# Altium PCB RPI_FEZ_DAC_00.PcbDoc
Units mm, origin at the board's own origin, x right, y up, seen from the top; angles counter-clockwise.
Board outline 65 x 30.5 mm, 2 copper layers (Top Layer, Bottom Layer), stack 1.571 mm thick; 37 components, 44 nets, 196 pads, 22 vias.
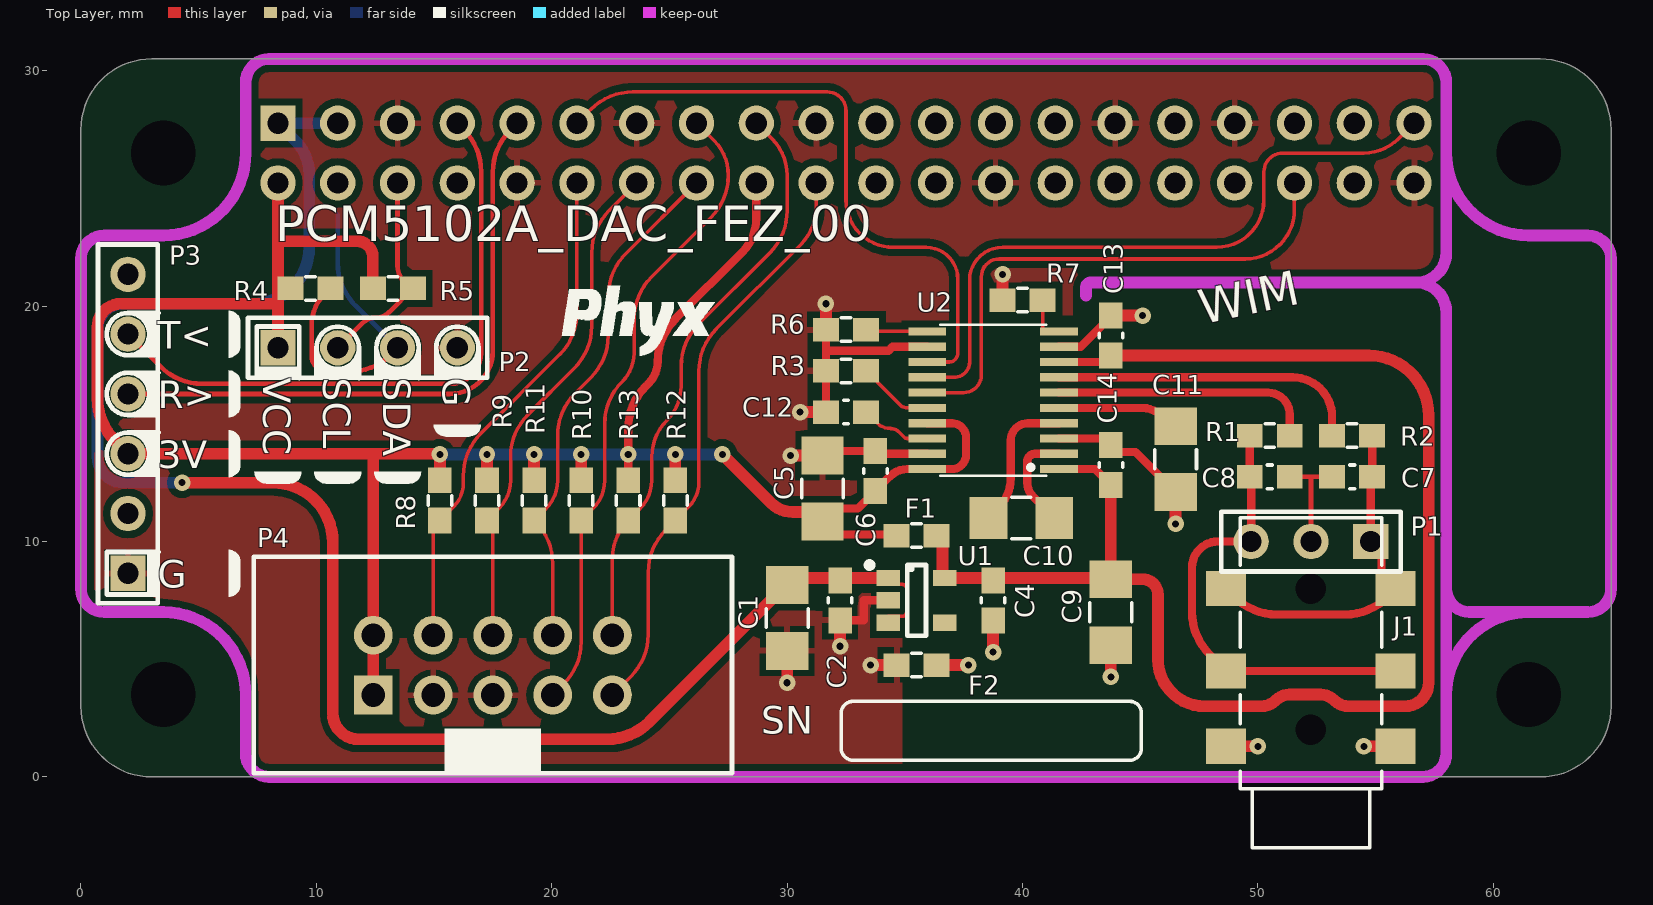
[diagram p0: Top Layer view]
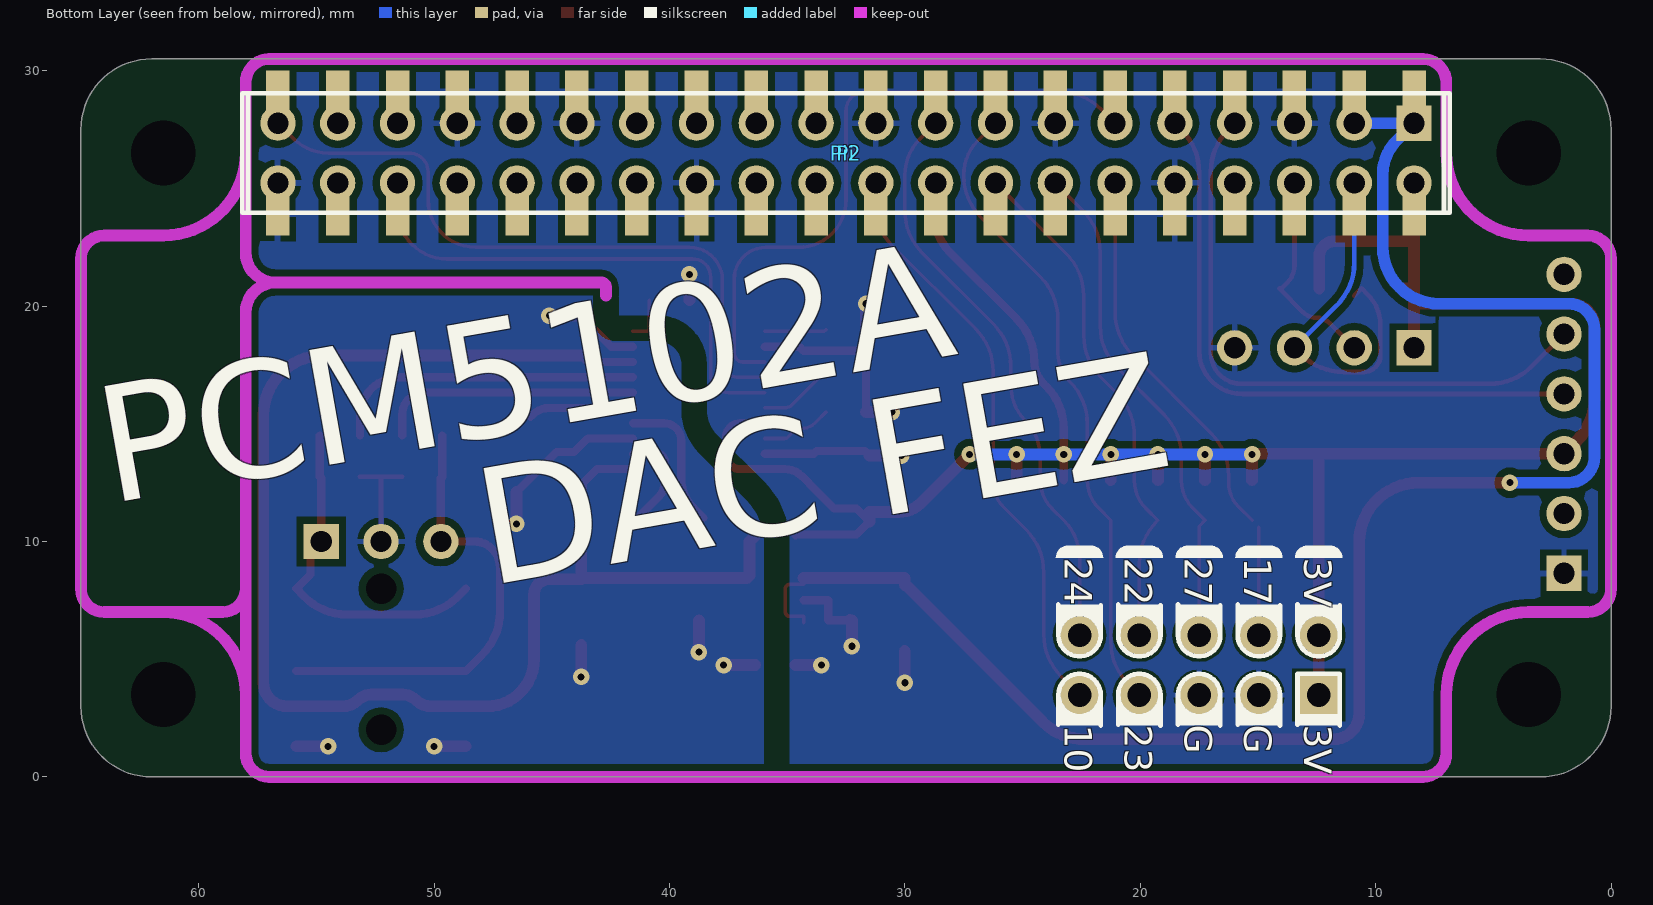
[diagram p1: Bottom Layer view, seen from below]

## Layer stack, top to bottom
Top Solder: solder mask 0.0102, Solder Resist, Dk 3.5
Top Layer: signal copper 0.0356
Dielectric1: core 1.5, FR-4, Dk 4.8
Bottom Layer: signal copper 0.0356
Bottom Solder: solder mask 0.0102, Solder Resist, Dk 3.5

## Board outline
0,3 0,27.5 cw(c3,27.5) 3,30.5 62,30.5 cw(c62,27.5) 65,27.5 65,3 cw(c62,3) 62,0 3,0 cw(c3,3)

## Design rules (kind name [scope] priority, off if disabled: settings)
Clearance Clearance_GND_POLY [InNamedPolygon('B_GND')] p1: gap=0.4 ignorepadtopadclearanceinfootprint=FALSE except(0: Arc-Hole Track-Hole SMDPad-Hole THPad-Hole Via-Hole Fill-Hole Poly-Hole Region-Hole Text-Hole)
Clearance [All] p2: gap=0.15 ignorepadtopadclearanceinfootprint=FALSE except(0: Arc-Hole Track-Hole SMDPad-Hole THPad-Hole Via-Hole Fill-Hole Poly-Hole Region-Hole Text-Hole; 0.3: Arc-Poly Track-Poly SMDPad-Poly THPad-Poly Via-Poly Fill-Poly; 1.1: Poly-Poly)
HoleSize [All] p1: absolutevalues=TRUE maxlimit=10 minlimit=0.025 maxpercent=80.000 minpercent=20.000
PolygonConnect PolygonConnect_VIA [IsVia] p1: connectstyle=Direct reliefconductorwidth=0.254 reliefentries=4 polygonreliefangle="90 Angle" airgapwidth=0.254
PolygonConnect [All] p2: connectstyle=Relief reliefconductorwidth=0.254 reliefentries=4 polygonreliefangle="90 Angle" airgapwidth=0.254
RoutingVias [All] p1: holewidth=0.3 width=0.7 viastyle="Through Hole" minholewidth=0.3 minwidth=0.2 maxholewidth=0.6 maxwidth=1.2
SilkToSolderMaskClearance SilkscreenOverComponentPads [IsPad] p1: minsilkscreentomaskgap=0.254 clearancetoexposedcopper=TRUE
SolderMaskExpansion [All] p1: expansion=0.05 istentingtop=FALSE
Width [All] p1: maxlimit=2 minlimit=0.15 preferedwidth=0.25
28 further rules are at their usual default settings.

## Classes and differential pairs
net class POWER: 3V3_Pi 3V3A 5V_Pi AGND GND

## Components (designator, comment, footprint, x,y, rotation, side; value= is the part's Value field where it differs from the comment)
C1 "CAP_CERAMIC" C1206_N 30,6.75 r270 top value="2u2F 25V"
C2 "CAP_CERAMIC" C0603_N 32.25,7.5 r270 top value="100nF 16V"
C4 "CAP_CERAMIC" C0603_N 38.75,7.5 r270 top value="100nF 16V"
C5 "CAP_CERAMIC" C1206_N 31.5,12.25 r90 top value="2u2F 25V"
C6 "CAP_CERAMIC" C0603_N 33.75,13 r90 top value="100nF 16V"
C7 "CAP_CERAMIC" C0603_N 54,12.75 r180 top value="2n2F 25V"
C8 "CAP_CERAMIC" C0603_N 50.5,12.75 r0 top value="2n2F 25V"
C9 "CAP_CERAMIC" C1206_N 43.75,7 r90 top value="2u2F 25V"
C10 "CAP_CERAMIC" C1206_N 39.95,11 r180 top value="2u2F 25V"
C11 "CAP_CERAMIC" C1206_N 46.5,13.5 r90 top value="2u2F 25V"
C12 "CAP_CERAMIC" C0603_N 32.5,15.5 r180 top value="100nF 16V"
C13 "CAP_CERAMIC" C0603_N 43.75,18.75 r90 top value="100nF 16V"
C14 "CAP_CERAMIC" C0603_N 43.75,13.25 r90 top value="100nF 16V"
F1 "BLM18KG601SN1D" L0603 35.5,10.25 r0 top value="1A3 0R15"
F2 "BLM18KG601SN1D" L0603 35.5,4.75 r0 top value="1A3 0R15"
J1 "3,5mm Stereo Audio Jack SMD" PJ-313D 52.25,8 r90 top value=PJ-313D
P1 "Header 3" HDR1X3 54.79,10 r180 top
P2 "Header 4" HDR1X4 8.37,18.23 r0 top
P3 "Header 6" HDR1X6 2,8.65 r90 top
P4 "Boxed Header 5X2" B_HDR2X5 17.5,4.75 r0 top
Pi "Receptacle # 2x20 61004021821" WE_61004021821 32.5,26.5 r0 bottom locked value=61004021821
Pi2 "Receptacle 20X2" HDR2X20 32.5,26.5 r0 bottom locked
R1 "RESISTOR" R0603_N 50.5,14.5 r0 top value=470R
R2 "RESISTOR" R0603_N 54,14.5 r180 top value=470R
R3 "RESISTOR" R0603_N 32.5,17.25 r180 top value=47K
R4 "RESISTOR" R0603_N 9.75,20.75 r0 top value=1K
R5 "RESISTOR" R0603_N 13.25,20.75 r0 top value=1K
R6 "RESISTOR" R0603_N 32.5,19 r180 top value=47K
R7 "RESISTOR" R0603_N 40,20.25 r180 top value=47K
R8 "RESISTOR" R0603_N 15.25,11.75 r270 top value=47K
R9 "RESISTOR" R0603_N 17.25,11.75 r270 top value=47K
R10 "RESISTOR" R0603_N 21.25,11.75 r90 top value=47K
R11 "RESISTOR" R0603_N 19.25,11.75 r270 top value=47K
R12 "RESISTOR" R0603_N 25.25,11.75 r90 top value=47K
R13 "RESISTOR" R0603_N 23.25,11.75 r270 top value=47K
U1 "3V3 150mA LDO" ONS_TSOP5 35.5,7.5 r0 top value=NCP511SN33T1G
U2 "Audio Stereo DAC 32BIT 112dB" TI_PW_R-PDSO-G20 38.75,16 r90 top value=PCM5102APWR

## Footprints (in the part's own frame and the unit in brackets; to place one, negate y for a bottom-side part, rotate by r counter-clockwise, add the part's x,y. Pads: shape width x height; smd on the part's side, far side on the other; paste and mask are expansions set on the pad)
B_HDR2X5 [mm] "Boxed Header 2x5 pins"
  rect 1.65x1.65 hole 1: 1(-5.08,-1.27)
  round 1.65 hole 1: 2(-5.08,1.27) 3(-2.54,-1.27) 4(-2.54,1.27) 5(0,-1.27) 6(0,1.27) 7(2.54,-1.27) 8(2.54,1.27) 9(5.08,-1.27) 10(5.08,1.27)
  silkscreen extent -10.16,-4.6 10.16,4.6, body extent -10.18,-4.42 10.18,4.75, height 8.93
C0603_N [mm] "Low density"
  rect 1.1x1 smd: 1(-0.85,0) 2(0.85,0)
  silkscreen extent -0.1,-0.5 0.1,0.5, body extent -0.8,-0.4 0.8,0.4, height 0.3
C1206_N [mm] "low density"
  rect 1.6x1.8 smd: 1(-1.4,0) 2(1.4,0)
  silkscreen extent -0.4,-0.89 0.4,0.89, body extent -1.6,-0.8 1.6,0.8, height 1
HDR1X3 [mm] "Connector; Header; 3 Position"
  rect 1.5x1.5 hole 0.9: 1(0,0)
  round 1.5 hole 0.9: 2(2.54,0) 3(5.08,0)
  silkscreen extent -1.27,-1.27 6.35,1.27, body extent -1.27,-1.23 6.35,1.27, height 8.2
HDR1X4 [mm] "Connector; Header; 4 Position"
  rect 1.5x1.5 hole 0.9: 1(0,0)
  round 1.5 hole 0.9: 2(2.54,0) 3(5.08,0) 4(7.62,0)
  silkscreen extent -1.27,-1.27 8.89,1.27, body extent -1.27,-1.23 8.89,1.27, height 8.2
HDR1X6 [mm] "Connector; Header; 6 Position"
  rect 1.5x1.5 hole 0.9: 1(0,0)
  round 1.5 hole 0.9: 2(2.54,0) 3(5.08,0) 4(7.62,0) 5(10.16,0) 6(12.7,0)
  silkscreen extent -1.27,-1.27 13.97,1.27, body extent -1.27,-1.23 13.97,1.27, height 8.2
HDR2X20 [mm] "Connector; Header; 20x2 Position"
  rect 1.5x1.5 hole 0.9: 1(-24.13,-1.27)
  round 1.5 hole 0.9: 2(-24.13,1.27) 3(-21.59,-1.27) 4(-21.59,1.27) 5(-19.05,-1.27) 6(-19.05,1.27) 7(-16.51,-1.27) 8(-16.51,1.27) 9(-13.97,-1.27) 10(-13.97,1.27) 11(-11.43,-1.27) 12(-11.43,1.27) 13(-8.89,-1.27) 14(-8.89,1.27) 15(-6.35,-1.27) 16(-6.35,1.27) 17(-3.81,-1.27) 18(-3.81,1.27) 19(-1.27,-1.27) 20(-1.27,1.27) 21(1.27,-1.27) 22(1.27,1.27) 23(3.81,-1.27) 24(3.81,1.27) 25(6.35,-1.27) 26(6.35,1.27) 27(8.89,-1.27) 28(8.89,1.27) 29(11.43,-1.27) 30(11.43,1.27) 31(13.97,-1.27) 32(13.97,1.27) 33(16.51,-1.27) 34(16.51,1.27) 35(19.05,-1.27) 36(19.05,1.27) 37(21.59,-1.27) 38(21.59,1.27) 39(24.13,-1.27) 40(24.13,1.27)
  silkscreen extent -25.4,-2.54 25.4,2.54, body extent -25.4,-2.54 25.4,2.54, height 8.5
L0603 [mm] "Low density 0603"
  rect 1.1x1 smd: 1(-0.85,0) 2(0.85,0)
  silkscreen extent -0.2,-0.5 0.2,0.5, body extent -0.8,-0.41 0.8,0.41, height 0.45
ONS_TSOP5 [mm] "SOT23, 5-Leads, Body 3,00x1,50mm, Pitch 0,95mm, IPC Medium Density"
  rect 1x0.7 smd: 1(-1.2,0.95) 2(-1.2,0) 3(-1.2,-0.95) 4(1.2,-0.95) 5(1.2,0.95)
  silkscreen extent -2.12,-1.5 0.4,1.62, body extent -1.5,-1.52 1.5,1.53, height 1.3
PJ-313D [mm] "PJ-313D Stereo Audio Jack SMD 3.5mm"
  round 1.2 hole 1.3 unplated: 0(-6,0) 0(0,0)
  rect 1.5x1.7 smd: 1(-6.7,-3.6) 1(-6.7,3.6) 2(-3.5,-3.6) 2(-3.5,3.6) 3(0,3.6) 3(0,-3.6)
  silkscreen extent -11,-3 3,3, body extent -11.04,-3 3,3, height 5
R0603_N [mm] "Low density"
  rect 1.1x1 smd: 1(-0.85,0) 2(0.85,0)
  silkscreen extent -0.2,-0.5 0.2,0.5, body extent -0.8,-0.41 0.8,0.41, height 0.45
TI_PW_R-PDSO-G20 [mm] "TI_PW_R-PDSO-G20"
  rect 0.35x1.6 smd mask+0.075: 1(-2.925,-2.8) 2(-2.275,-2.8) 3(-1.625,-2.8) 4(-0.975,-2.8) 5(-0.325,-2.8) 6(0.325,-2.8) 7(0.975,-2.8) 8(1.625,-2.8) 9(2.275,-2.8) 10(2.925,-2.8) 11(2.925,2.8) 12(2.275,2.8) 13(1.625,2.8) 14(0.975,2.8) 15(0.325,2.8) 16(-0.325,2.8) 17(-0.975,2.8) 18(-1.625,2.8) 19(-2.275,2.8) 20(-2.925,2.8)
  silkscreen extent -3.2,-2.25 3.2,2.25, body extent -3.3,-3.28 3.3,3.28, height 1.2
WE_61004021821 [mm] "Connector; Receptable; 20x2 Position SMD"
  rect 1x1.8 smd: 1(-24.13,-2.6) 2(-24.13,2.6) 3(-21.59,-2.6) 4(-21.59,2.6) 5(-19.05,-2.6) 6(-19.05,2.6) 7(-16.51,-2.6) 8(-16.51,2.6) 9(-13.97,-2.6) 10(-13.97,2.6) 11(-11.43,-2.6) 12(-11.43,2.6) 13(-8.89,-2.6) 14(-8.89,2.6) 15(-6.35,-2.6) 16(-6.35,2.6) 17(-3.81,-2.6) 18(-3.81,2.6) 19(-1.27,-2.6) 20(-1.27,2.6) 21(1.27,-2.6) 22(1.27,2.6) 23(3.81,-2.6) 24(3.81,2.6) 25(6.35,-2.6) 26(6.35,2.6) 27(8.89,-2.6) 28(8.89,2.6) 29(11.43,-2.6) 30(11.43,2.6) 31(13.97,-2.6) 32(13.97,2.6) 33(16.51,-2.6) 34(16.51,2.6) 35(19.05,-2.6) 36(19.05,2.6) 37(21.59,-2.6) 38(21.59,2.6) 39(24.13,-2.6) 40(24.13,2.6)
  silkscreen extent -25.65,-2.54 25.65,2.54, body extent -25.65,-3.35 25.65,3.35, height 7.42

## Part data
C1 C5 C9 C10 C11: library part "CAP # 2u2F 25V 1206", "Capacitor Ceramic", Supplier Part Number 1=1735544, Supplier 1=Farnell
C2 C4 C6 C12 C13 C14: library part "CAP # 100nF 16V 0603", "Capacitor Ceramic"
C7 C8: library part "CAP # 2n2F 25V 0603", "Capacitor Ceramic"
F1 F2: library part "FER # 600R 1A3 0603 0R15 BLM18KG601SN1D", Supplier Part Number 1=1781094, Supplier 1=Farnell
J1: library part "AUDIO JACK # 3.5 3c PJ-313D", "=Description", Supplier Part Number 1=PJ-313D, Supplier 1=AliExpress
P1: library part "Pin Header 2.54mm 3way"
P2: library part "Pin Header 2.54mm 4way"
P3: library part "Pin Header 2.54mm 6way"
P4: library part "Pin Header 2.54mm dual row 10way Boxed"
Pi: "=Description", Supplier 1=Farnell
Pi2: library part "Pin Header 2.54mm dual row 40way", "=Description"
R1 R2: library part "RES # 470R 0603"
R3 R6 R7 R8 R9 R10 R11 R12 R13: library part "RES # 47K 0603"
R4 R5: library part "RES # 1K 0603"
U1: library part "LDO # 3V3 0A15 NCP511SN33T1G", "=Description", Supplier Part Number 1=1652367, Supplier 1=Farnell
U2: library part "DAC # AUDIO PCM5102APWR", "=Description", Supplier Part Number 1=2402251, Supplier 1=Farnell

## Free pads (board coordinates)
  round 1.3 hole 2.75 unplated mask+2.45: 0(3.5,3.5) 0(3.5,26.5) 0(61.5,3.5) 0(61.5,26.5)

## Via types
v1: diameter 0.7, hole 0.3, Top Layer to Bottom Layer, 22 vias

## Nets (pads, with @x,y where several pads share a name; then routed paths per layer and width w, separated by ;. In a path a pad name is that pad's centre, name@x,y a point inside that pad or via, vN(x,y) a via of type N, cw(c..) or ccw(c..) an arc to the next point about the centre after c; other vN are vias at no path point)
3V3_PI: C5.1 C6.1 F1.1 P2.1 P3.3 P4.1 P4.2 Pi2.2 Pi2.18 Pi.2 Pi.18 R4.1 R5.1 R8.1 R9.1 R10.2 R11.1 R12.2 R13.1 U2.17 U2.20 | length 101.9
  Top Layer w0.35: R13.1 v1(23.25,13.7) 23.25,14.798 cw(c25.79,14.798) 23.994,16.594 24.113,16.713 ccw(c23.177,17.648) 24.5,17.648 cw(c27.04,17.648) 25.244,19.444 28.1,22.3 ccw(c26.675,23.725) 28.69,23.725 Pi2.18 ; C6.1 34.375,12.775 cw(c35.1,12.049) 35.1,13.075 U2.20 37,13.075 ccw(c37,13.675) 37.6,13.675 37.6,14.425 ccw(c37,14.425) 37,15.025 U2.17 ; C6.1 33,11.4 32.05,11.4 C5.1 32.05,10.3 34.6,10.3 F1.1
  Top Layer w0.5: 1.444,14.286 P3.3 12.42,13.73 ; 1.444,14.286 cw(c3.24,16.082) 0.7,16.082 0.7,19.1 cw(c1.7,19.1) 1.7,20.1 8.37,20.1 ; P2.1 8.37,20.1 ; R4.1@8.37,20.75 R4.1 ; Pi2.2 8.37,22.75 ; R5.1 12.4,22.1 ccw(c11.75,22.1) 11.75,22.75 8.37,22.75 ; P4.1 P4.2 12.42,13.73 ; R8.1 v1(15.25,13.7) ccw(c15.178,13.628) 15.178,13.73 12.42,13.73 ; R9.1 v1(17.25,13.7) ; R11.1 v1(19.25,13.7) ; R10.2@21.25,12.6 v1(21.25,13.7) ; R12.2@25.25,12.6 v1(25.25,13.7) ; v1(27.25,13.7) 29.311,11.639 ccw(c30.25,12.578) 30.25,11.25 31.5,11.25 C5.1 ; 8.37,20.1 8.37,22.75
  Bottom Layer w0.5: v1(15.25,13.7) v1(21.25,13.7) v1(25.25,13.7) v1(27.25,13.7)
3V3A: C4.1 C9.2 C13.1 C14.1 F1.2 U1.5 U2.1 U2.8 | length 62.7
  Top Layer w0.35: U2.1 43.075,13.075 C14.1 ; U2.8 43.475,17.625 C13.1
  Top Layer w0.5: F1.2 36.6,10 36.6,8.55 U1.5 43.7,8.45 C9.2 ; C14.1 C9.2 ; C13.1 54.71,17.9 cw(c54.71,15.36) 57.25,15.36 57.25,4 cw(c56.25,4) 56.25,3 53.854,3 cw(c53.854,3.854) 53.25,3.25 ccw(c52.646,2.646) 52.646,3.5 51.354,3.5 ccw(c51.354,2.646) 50.75,3.25 cw(c50.146,3.854) 50.146,3 47.75,3 cw(c47.75,5) 45.75,5 45.75,7.75 ccw(c45.1,7.75) 45.1,8.4 C9.2
5V_PI: C1.1 C2.1 Pi2.1 Pi2.3 Pi.1 Pi.3 U1.1 U1.3 | length 74.4
  Top Layer w0.15: U1.3 34.3,6.825 34.9,6.825 ccw(c34.9,7) 35.075,7 35.075,8 ccw(c34.9,8) 34.9,8.175 34.3,8.175 U1.1
  Top Layer w0.5: v1(4.3,12.5) 8.16,12.5 cw(c8.16,9.96) 10.7,9.96 10.7,2.7 ccw(c11.8,2.7) 11.8,1.6 22.348,1.6 ccw(c22.348,4.14) 24.144,2.344 29.915,8.115 cw(c30,8.029) C1.1 30,8.45 U1.1
  Bottom Layer w0.5: v1(4.3,12.5) 1.8,12.5 cw(c1.8,13.6) 0.7,13.6 0.7,19 cw(c1.8,19) 1.8,20.1 7.3,20.1 ccw(c7.3,22.5) 9.7,22.5 9.7,25.6 ccw(c7.672,25.6) 9.106,27.034 Pi2.1 Pi2.3
AGND: C4.2 C7.2 C8.2 C9.1 C11.1 C13.2 C14.2 F2.2 J1.1 P1.2 U2.3 U2.9 | length 22.7
  Top Layer w0.2: C8.2@51.35,12.75 C7.2 ; P1.2 52.25,12.75
  Top Layer w0.35: U2.3 43.475,14.375 C14.2 44.05,13.8 44.8,13.8 C11.1 ; U2.9 42.475,18.275 43.75,19.55 C13.2
  Top Layer w0.5: F2.2 v1(37.7,4.75) ; v1(38.75,5.3) C4.2 ; v1(43.75,4.25) C9.1 ; C13.2 v1(45.1,19.6) ; v1(46.5,10.75) C11.1 ; J1.1@48.65,1.3 v1(50,1.3) ; v1(54.5,1.3) J1.1@55.85,1.3
CAPM: C10.2 U2.4 | length 6.1
  Top Layer w0.35: C10.2 38.97,11.42 ccw(c37.689,12.7) 39.5,12.7 39.5,14.3 cw(c40.225,14.3) 40.225,15.025 U2.4
CAPP: C10.1 U2.2 | length 4.4
  Top Layer w0.35: C10.1 40.447,11.903 cw(c41.045,12.5) 40.2,12.5 40.2,13.4 cw(c40.525,13.4) 40.525,13.725 U2.2
DEMP: R7.1 U2.10 | length 2
  Top Layer w0.15: R7.1 40.85,18.925 U2.10
FLT: R6.1 U2.11 | length 2.6
  Top Layer w0.15: R6.1 33.425,18.925 U2.11
FMT: R3.1 U2.16 | length 3.2
  Top Layer w0.15: R3.1 34.801,15.799 ccw(c35.1,16.098) 35.1,15.675 U2.16
GND: C1.2 C2.2 C5.2 C6.2 C12.2 F2.1 P2.4 P3.1 P4.3 P4.5 Pi2.5 Pi2.10 Pi2.13 Pi2.19 Pi2.26 Pi2.29 Pi2.33 Pi2.40 Pi.5 Pi.10 Pi.13 Pi.19 Pi.26 Pi.29 Pi.33 Pi.40 R3.2 R6.2 R7.2 U1.2 U2.12 U2.19 | length 23.7
  Top Layer w0.35: C5.2 31.7,13.85 C6.2 33.875,13.725 U2.19 ; C12.2 31.65,18.1 ; R6.2 31.65,18.1 ; C2.2@32.356,6.756 C2.2 33.25,6.65 33.25,7.5 U1.2 ; U2.12 34.475,18.275 34.3,18.1 31.65,18.1
  Top Layer w0.5: v1(30,4) C1.2 ; v1(30.15,13.65) C5.2 ; v1(30.55,15.5) C12.2 ; R6.2 v1(31.65,20.1) ; v1(32.25,5.55) C2.2 ; v1(33.55,4.75) F2.1 ; R7.2 v1(39.15,21.35)
GPIO5: Pi2.30 Pi.30
GPIO6: Pi2.32 Pi.32
GPIO7: Pi2.25 Pi.25
GPIO8: Pi2.23 Pi.23
GPIO9: Pi2.22 Pi.22
GPIO10: P4.9 Pi2.20 Pi.20 R12.1 | length 24.8
  Top Layer w0.15: P4.9 23.356,4.256 ccw(c21.56,6.052) 24.1,6.052 24.1,8.698 cw(c26.64,8.698) 24.844,10.494 R12.1 25.8,11.45 ccw(c24.714,12.537) 26.25,12.537 26.25,17.237 cw(c28.79,17.237) 26.994,19.034 30.572,22.612 ; 30.573,22.613 ccw(c28.984,24.2) 31.23,24.2 Pi2.20
GPIO11: Pi2.24 Pi.24
GPIO12: Pi2.31 Pi.31
GPIO13: Pi2.34 Pi.34
GPIO16: Pi2.35 Pi.35
GPIO17: P4.4 Pi2.12 Pi.12 R8.2 | length 21
  Top Layer w0.15: P4.4 R8.2@14.96,10.61 ; R8.2 15.826,11.475 ccw(c14.801,12.5) 16.25,12.5 16.25,12.8 cw(c18.785,12.8) 16.395,13.645 cw(c18.785,12.8) 16.992,14.592 20.326,17.926 ccw(c18.53,19.722) 21.07,19.722 Pi2.12
GPIO20: Pi2.37 Pi.37
GPIO22: P4.8 Pi2.16 Pi.16 R11.2 | length 21.9
  Top Layer w0.15: P4.8 20.04,9.058 ccw(c17.5,9.058) 19.296,10.854 R11.2 19.755,11.405 ccw(c18.56,12.6) 20.25,12.6 20.25,14.498 cw(c22.79,14.498) 20.425,15.425 cw(c22.79,14.498) 20.994,16.294 21.656,16.956 ccw(c19.86,18.752) 22.4,18.752 22.4,20.428 cw(c24.94,20.428) 22.75,21.714 cw(c24.94,20.428) 23.144,22.224 Pi2.16
GPIO23: P4.7 Pi2.15 Pi.15 R10.1 | length 27.3
  Top Layer w0.15: P4.7 20.506,3.946 ccw(c18.71,5.742) 21.25,5.742 R10.1 21.755,11.405 ccw(c20.56,12.6) 22.25,12.6 22.25,14.998 cw(c24.79,14.998) 22.994,16.794 ccw(c21.772,18.016) 23.378,17.378 ccw(c21.772,18.016) 23.5,18.016 23.5,19.448 cw(c26.04,19.448) 24.244,21.244 26.756,23.756 ccw(c24.96,25.552) 27.5,25.552 27.5,25.572 ccw(c25.451,25.572) 26.9,27.02 Pi2.15
GPIO24: P4.10 Pi2.17 Pi.17 R13.2 | length 24.7
  Top Layer w0.15: P4.10 22.58,9.282 cw(c24.868,9.282) R13.2 23.755,11.405 ccw(c22.56,12.6) 24.25,12.6 24.25,13.6 cw(c26.423,13.6) 24.886,15.136 ccw(c23.405,16.618) 24.887,15.137 ccw(c23.405,16.618) 25.5,16.618 25.5,17.448 cw(c28.04,17.448) 26.244,19.244 29.256,22.256 ccw(c27.46,24.052) 30,24.052 30,25.555 ccw(c27.816,25.555) 29.36,27.1 Pi2.17
GPIO25: Pi2.21 Pi.21
GPIO26: Pi2.38 Pi.38
GPIO27: P4.6 Pi2.14 Pi.14 R9.2 | length 21.5
  Top Layer w0.15: P4.6 17.5,10.65 R9.2 17.755,11.405 ccw(c16.56,12.6) 18.25,12.6 18.25,13.598 cw(c20.79,13.598) 18.37,14.37 cw(c20.79,13.598) 18.994,15.394 20.956,17.356 ccw(c19.16,19.152) 21.7,19.152 21.7,22.268 cw(c24.24,22.268) 22,23.465 cw(c24.24,22.268) 22.444,24.064 Pi2.14
I2S.BCK: Pi2.11 Pi.11 U2.13 | length 27.5
  Top Layer w0.15: Pi2.11 21.656,28.356 cw(c23.452,26.56) 23.452,29.1 31.7,29.1 cw(c31.7,28.3) 31.935,29.065 cw(c31.7,28.3) 32.465,28.535 cw(c31.7,28.3) 32.5,28.3 32.5,24.5 ccw(c34.5,24.5) 32.589,23.911 ccw(c34.5,24.5) 33.911,22.589 ccw(c34.5,24.5) 34.5,22.5 35.9,22.5 cw(c35.9,21.15) 37.25,21.15 37.25,18 cw(c36.875,18) 36.875,17.625 U2.13
I2S.DATA: Pi2.39 Pi.39 U2.14 | length 28.6
  Top Layer w0.15: U2.14 37.1,16.975 ccw(c37.1,17.625) 37.24,16.99 ccw(c37.1,17.625) 37.735,17.485 ccw(c37.1,17.625) 37.75,17.625 37.75,21.1 cw(c39.15,21.1) 39.15,22.5 48.25,22.5 ccw(c48.25,24.5) 50.25,24.5 50.25,25.7 cw(c51.05,25.7) 50.368,26.118 cw(c51.05,25.7) 50.632,26.382 cw(c51.05,25.7) 51.05,26.5 54.484,26.5 ccw(c54.484,28.616) 55.98,27.12 Pi2.39
I2S.LRCK: Pi2.36 Pi.36 U2.15 | length 23
  Top Layer w0.15: U2.15 37.5,16.325 ccw(c37.5,17.075) 38.25,17.075 38.25,21.25 cw(c39,21.25) 39,22 49.45,22 ccw(c49.45,24.1) 50.579,22.329 ccw(c49.45,24.1) 51.221,22.971 ccw(c49.45,24.1) 51.55,24.1 Pi2.36
ID_SC: Pi2.27 Pi.27
ID_SD: Pi2.28 Pi.28
L_CH: C8.1 J1.2 P1.3 R1.1 | length 19.8
  Top Layer w0.35: R1.1 C8.1 49.71,12.69 P1.3 48.3,10 ccw(c48.3,8.9) 47.756,9.856 ccw(c48.3,8.9) 47.344,9.444 ccw(c48.3,8.9) 47.2,8.9 47.2,7.002 ccw(c49.74,7.002) 47.944,5.206 48.65,4.5 J1.2@55.85,4.5
LDOO: C12.1 U2.18 | length 3
  Top Layer w0.15: C12.1 33.803,15.047 ccw(c34.4,15.645) 34.4,14.8 cw(c34.4,14.317) 34.7,14.695 cw(c34.4,14.317) 34.741,14.659 34.972,14.428 ccw(c35.1,14.556) 35.1,14.375 U2.18
OUTL: R1.2 U2.6 | length 11.2
  Top Layer w0.35: U2.6 50.425,16.325 cw(c50.425,15.4) 51.35,15.4 R1.2
OUTR: R2.2 U2.7 | length 13.4
  Top Layer w0.35: U2.7 51.475,16.975 cw(c51.475,15.3) 52.181,16.819 cw(c51.475,15.3) 52.994,16.006 cw(c51.475,15.3) 53.15,15.3 R2.2
R_CH: C7.1 J1.3 P1.1 R2.1 | length 14.9
  Top Layer w0.35: J1.3@48.65,8 49.006,7.644 ccw(c50.802,9.44) 50.802,6.9 53.698,6.9 ccw(c53.698,9.44) 55.494,7.644 55.85,8 55.25,8.6 55.25,9.54 P1.1 54.79,12.69 C7.1 R2.1
RPI.RX: P3.4 Pi2.9 Pi.9 | length 26.5
  Top Layer w0.2: P3.4 15.67,16.27 ccw(c15.67,18.1) 17.5,18.1 17.5,25.688 cw(c20.04,25.688) 18.244,27.484 Pi2.9
RPI.TX: P3.5 Pi2.7 Pi.7 | length 26.6
  Top Layer w0.2: P3.5 3.366,17.444 ccw(c5.162,19.24) 5.162,16.7 15.71,16.7 ccw(c15.71,17.99) 17,17.99 17,25.708 ccw(c14.46,25.708) 16.256,27.504 Pi2.7
SCL1: P2.2 Pi2.6 Pi.6 R5.2 | length 8.9
  Top Layer w0.2: P2.2 11.954,19.274 cw(c12.5,18.728) 12.5,19.5 ccw(c12.5,20.345) 13.097,19.747 R5.2 cw(c14.1,20.992) 13.929,20.821 13.75,21 cw(c14.474,21.724) 13.45,21.724 Pi2.6
SDA1: P2.3 Pi2.4 Pi.4 R4.2 | length 14.5
  Top Layer w0.2: R4.2@10.91,20.44 R4.2 10.33,20.48 ccw(c11.611,19.2) 9.8,19.2 9.8,17.9 ccw(c10.5,17.9) 10.5,17.2 11.368,17.2 ccw(c11.368,19.74) 13.164,17.944 P2.3
  Bottom Layer w0.2: Pi.4 10.91,21.822 ccw(c13.45,21.822) 11.654,20.026 P2.3
VNEG: C11.2 U2.5 | length 4.5
  Top Layer w0.35: U2.5 45.1,15.675 cw(c45.1,14.649) 45.826,15.374 C11.2@45.9,15.3
WP: Pi2.8 Pi.8
pads on no net: J1.0 P3.2 P3.6 U1.4

## Polygon pours and split planes (outlines as drawn)
AGND on Bottom Layer "AGND_L02_P002" (solid, remove dead copper, pour order 2): 43.25,21 43.25,19.5 cw(c42.25,19.5) 42.25,18.5 40.5,18.5 ccw(c40.5,17.5) 39.5,17.5 39.5,15.552 cw(c36.96,15.552) 38.756,13.756 36.744,11.744 ccw(c38.54,9.948) 36,9.948 36,0 58,0 58,21
GND on Bottom Layer "GND_L02_P004" (solid, remove dead copper, pour order 4): 65,32.5 65,0 0,0 0,32.5
GND on Top Layer "GND_L01_P008" (solid, remove dead copper, pour order 8): 34.891,0.561 34.891,10.407 cw(c37.431,10.407) 35.634,12.204 37.647,14.216 ccw(c35.851,16.012) 38.391,16.012 38.391,17.598 cw(c40.402,17.598) 40.402,19.609 42.141,19.609 42.141,20.801 cw(c42.9,20.801) 42.9,21.561 58,21.561 58,30.5 0,30.5 0,0

## Keep-outs
Keep-Out Layer:
  lines w0.5: 0,21.9 0,8 ccw(c1,8) 1,7 3.5,7 cw(c3.5,3.5) 7,3.5 7,1 ccw(c8,1) 8,0 57,0 ccw(c57,1) 58,1 ; 0,22 cw(c1,22) 1,23 3.5,23 ccw(c3.5,26.5) 7,26.5 7,29.5 cw(c8,29.5) 8,30.5 57,30.5 cw(c57,29.5) 58,29.5 ; 42.7,20.45 42.7,20.8 cw(c42.9,20.8) 42.9,21 56.73,21 ; 58,8 ccw(c59,8) 59,7 61.75,7 ; 56.73,21 cw(c56.73,19.73) 58,19.73 58,1 ; 56.73,21 ccw(c56.73,22.27) 58,22.27 58,29.5 ; 58,1 58,3.5 cw(c61.5,3.5) 61.5,7 64,7 ccw(c64,8) 65,8 65,22 ccw(c64,22) 64,23 61.5,23 cw(c61.5,26.5) 58,26.5 58,29.5
  text ".Layer_Name" at 305.5,-54 h3.5

## Other copper
Top Layer:
  text ".Layer_Name" at 305.5,-54 h3.5
Bottom Layer:
  text ".Layer_Name" at 305.5,-54 h3.5

## Silkscreen, mask and mechanical layers (free items; w line width, h text height)
Top Overlay:
  drawing of 78 lines, arcs and shapes, not listed
  text "PCM5102A_DAC_FEZ_00" at 8.25,22.25 h2.6
  text "WIM" at 47.75,18.75 h2.5 r12
  text "T<" at 3.27,17.81 h2
  text "VCC" at 7.37,16.96 h2 r270
  text "SCL" at 9.91,16.96 h2 r270
  text "SDA" at 12.45,16.96 h2 r270
  text "G" at 14.99,16.96 h2 r270
  text "R>" at 3.27,15.27 h2
  text "3V" at 3.27,12.73 h2
  text "G" at 3.27,7.65 h2
  text "SN" at 28.9,1.46 h2
  text ".Layer_Name" at 305.5,-54 h3.5
Bottom Overlay:
  drawing of 82 lines, arcs and shapes, not listed
  text "PCM5102A" at 63.5,10 h8.5 r350
  text "3V" at 13.42,9.32 h2 r90
  text "17" at 15.96,9.32 h2 r90
  text "27" at 18.5,9.32 h2 r90
  text "22" at 21.04,9.32 h2 r90
  text "24" at 23.58,9.32 h2 r90
  text "DAC FEZ" at 47.4,6.5 h8.5 r350
  text "3V" at 13.42,2.21 h2 r90
  text "G" at 15.96,2.21 h2 r90
  text "G" at 18.5,2.21 h2 r90
  text "23" at 21.04,2.21 h2 r90
  text "10" at 23.58,2.21 h2 r90
  text ".Layer_Name" at 305.5,-54 h3.5
Top Paste:
  text ".Layer_Name" at 305.5,-54 h3.5
Bottom Paste:
  text ".Layer_Name" at 305.5,-54 h3.5
Top Solder:
  text ".Layer_Name" at 305.5,-54 h3.5
Bottom Solder:
  text ".Layer_Name" at 305.5,-54 h3.5
Drill Guide:
  text ".Layer_Name" at 305.5,-54 h3.5
3D Symbols:
  text ".Layer_Name" at 305.5,-54 h3.5
Outline:
  the board outline again, w0.1
Comments:
  lines w0.5: 31.5,26.5 33.5,26.5 ; 32.5,25.5 32.5,27.5
  text "Center point" at 24,27.7 h1.52
  text ".Layer_Name" at 305.5,-54 h3.5
Fabrication:
  text ".Layer_Name" at 305.5,-54 h3.5
Placebound Top:
  text ".Layer_Name" at 305.5,-54 h3.5
Placebound Bottom:
  text ".Layer_Name" at 305.5,-54 h3.5
Frame:
  drawing of 15 lines, arcs and shapes, not listed
  text "Document" at 301,-39 h2
  text ".PCB_TITLE" at 302.5,-44.5 h4
  text "Layer Name" at 301,-49 h2
  text "Date" at 301,-59 h2
  text "Rev" at 341,-59 h2
  text ".Print_Date" at 304,-64.5 h3.5
  text ".PCB_REV" at 345.5,-64.5 h4
  text "Desginer" at 251,-69 h2
  text "Document" at 301,-69 h2
  text ".Pcb_File_Name_No_Path" at 302.5,-74 h1.5
  text ".PCB_ENGINEER" at 255.5,-74.5 h4
Assembly Top:
  text ".Layer_Name" at 305.5,-54 h3.5
Assembly Bottom:
  text ".Layer_Name" at 305.5,-54 h3.5
Drill Drawing:
  text ".legend" at 89.1,-14.2 h2
  text ".Layer_Name" at 305.5,-54 h3.5

## Dimensions
62,27.5 to 68,32 on Fabrication
3.5,3.5 to 3,0 on Drill Drawing
0,3 to 3.5,3.5 on Drill Drawing
0,3 to 65,3 on Fabrication
3,30.5 to 3,0 on Fabrication

## Text inside footprints (layer, text, board x,y; h text height)
J1: Comments "PCB EDGE" at 54.5,0.75 h0.6 r180